# Altium PCB ResetRelays.PcbDoc
Units mm, origin at the board's own origin, x right, y up, seen from the top; angles counter-clockwise.
Board outline 46 x 79 mm, 2 copper layers (Top Layer, Bottom Layer); 10 components, 10 nets, 52 pads, 0 vias.
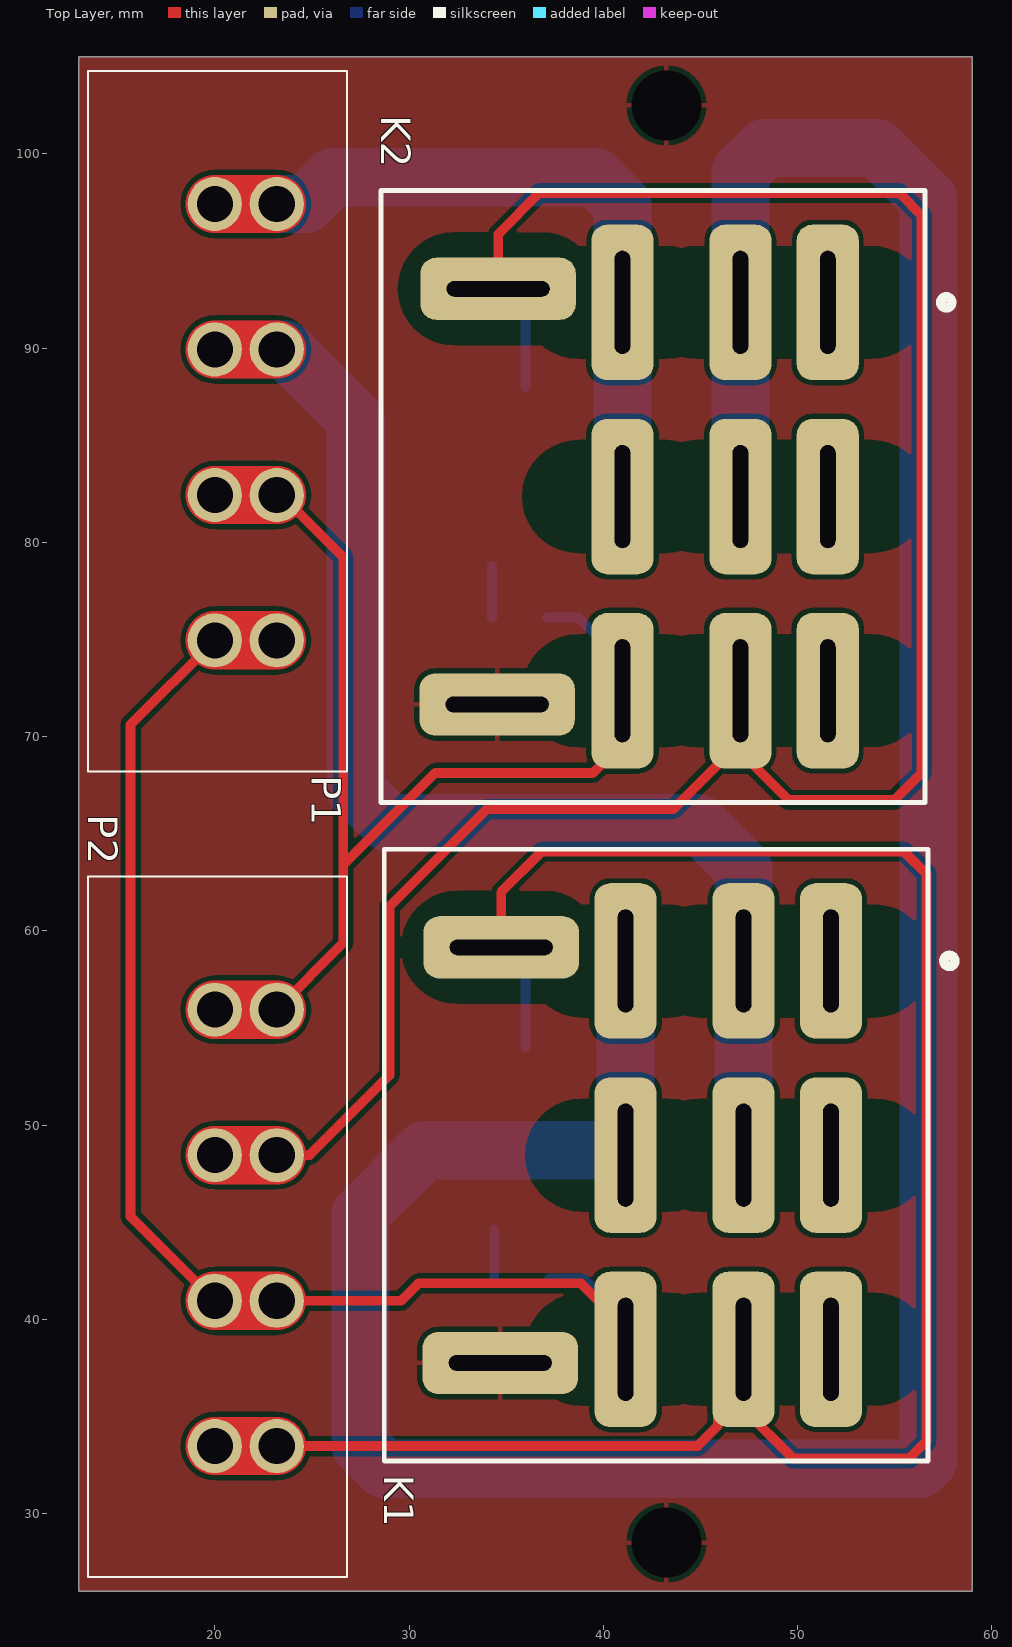
[diagram p0: Top Layer view]
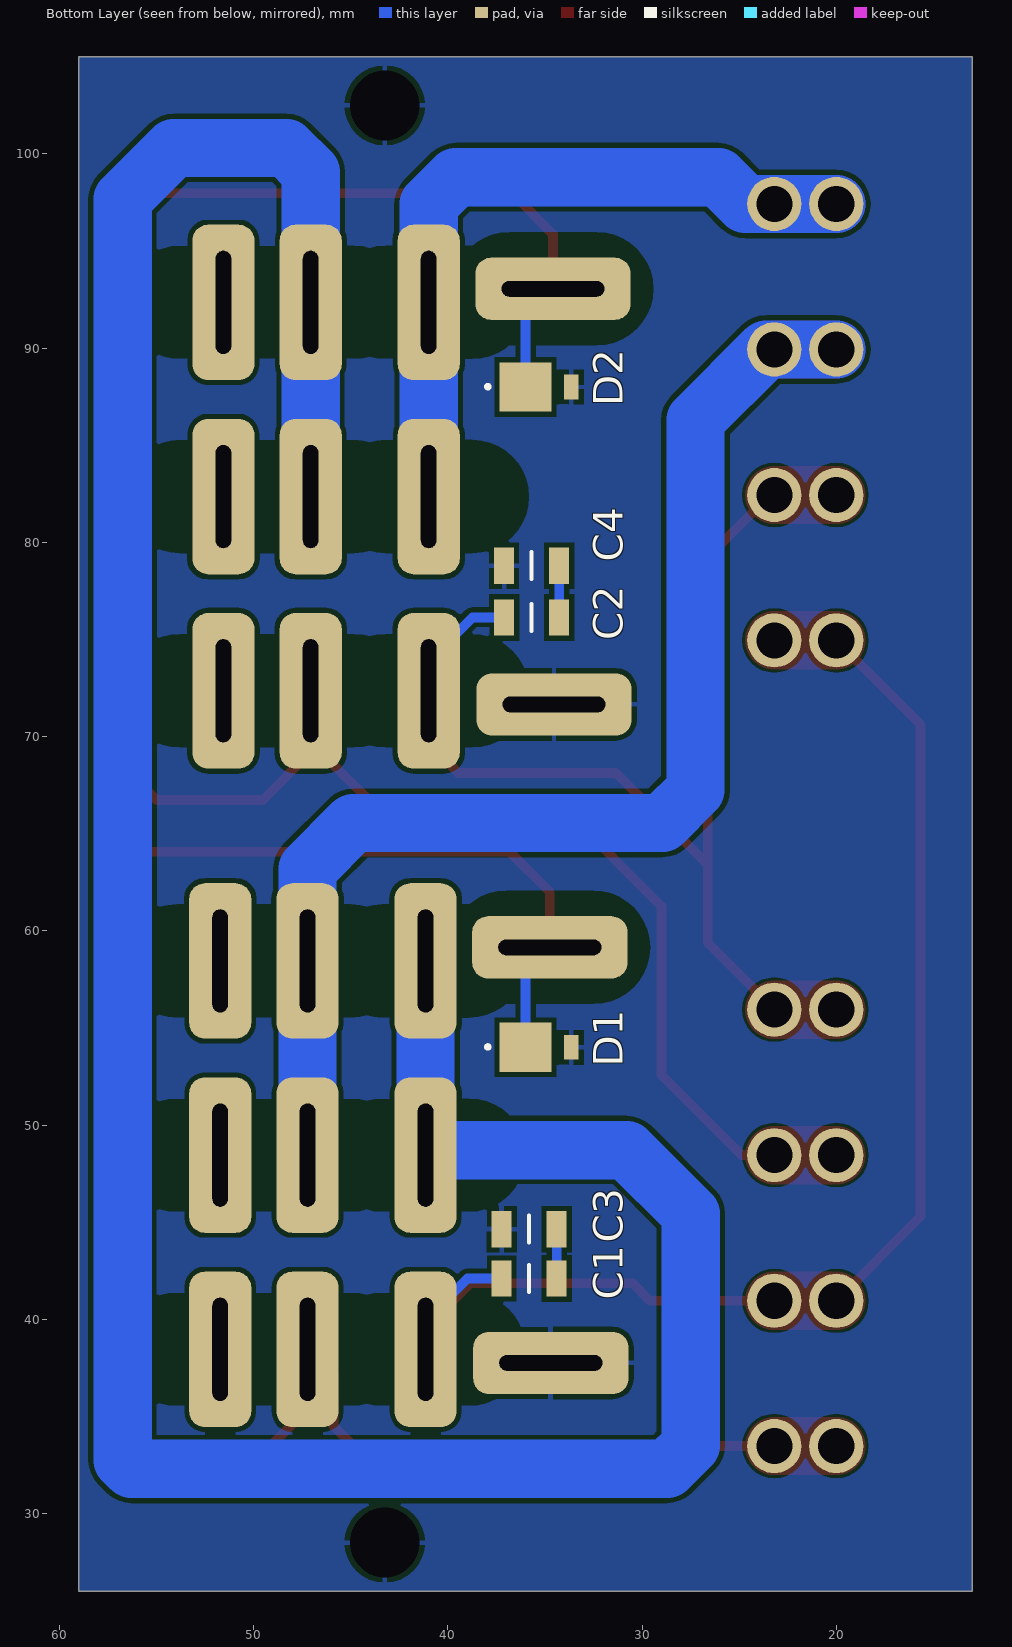
[diagram p1: Bottom Layer view, seen from below]
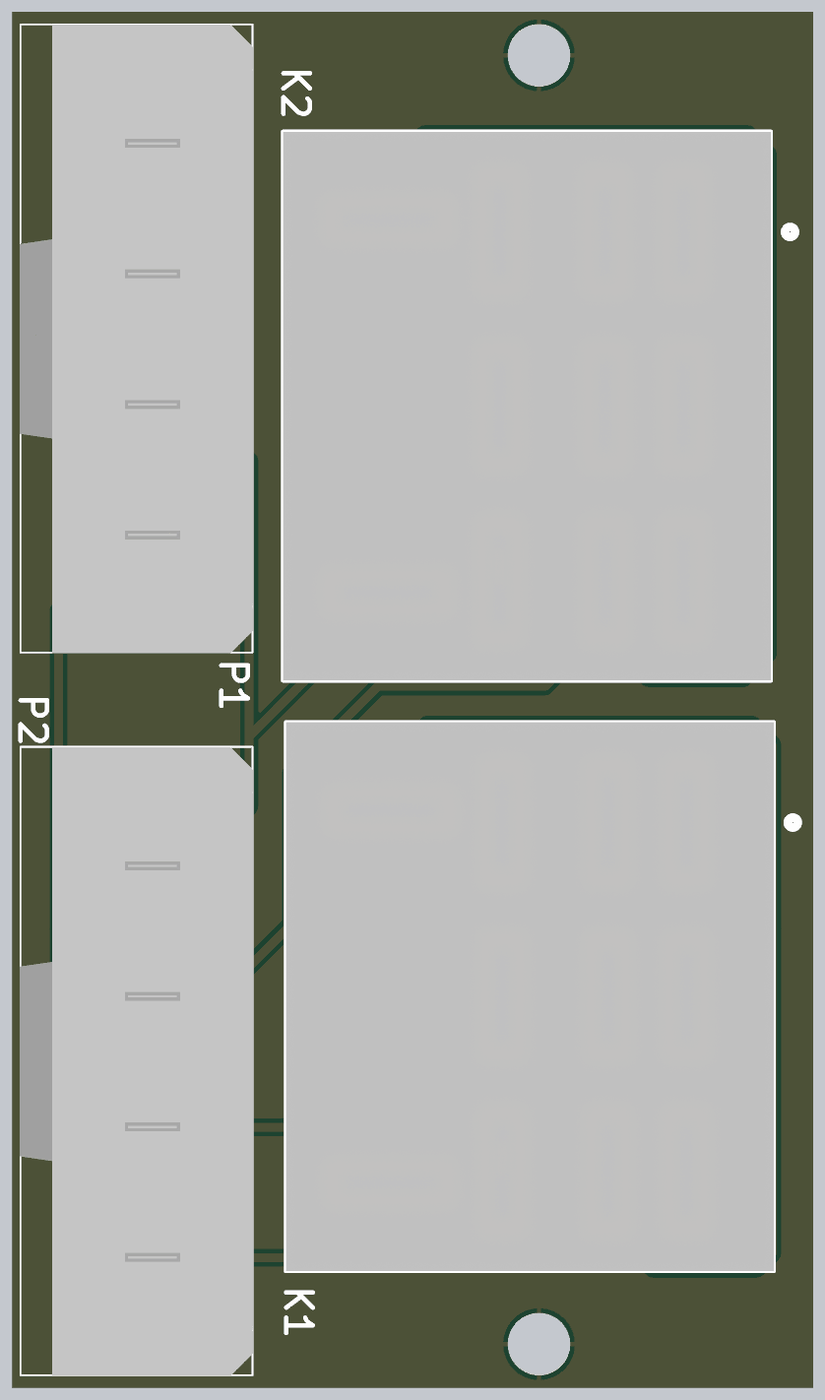
[diagram p2: 3D render of the assembled board from above, using the file's embedded part models]
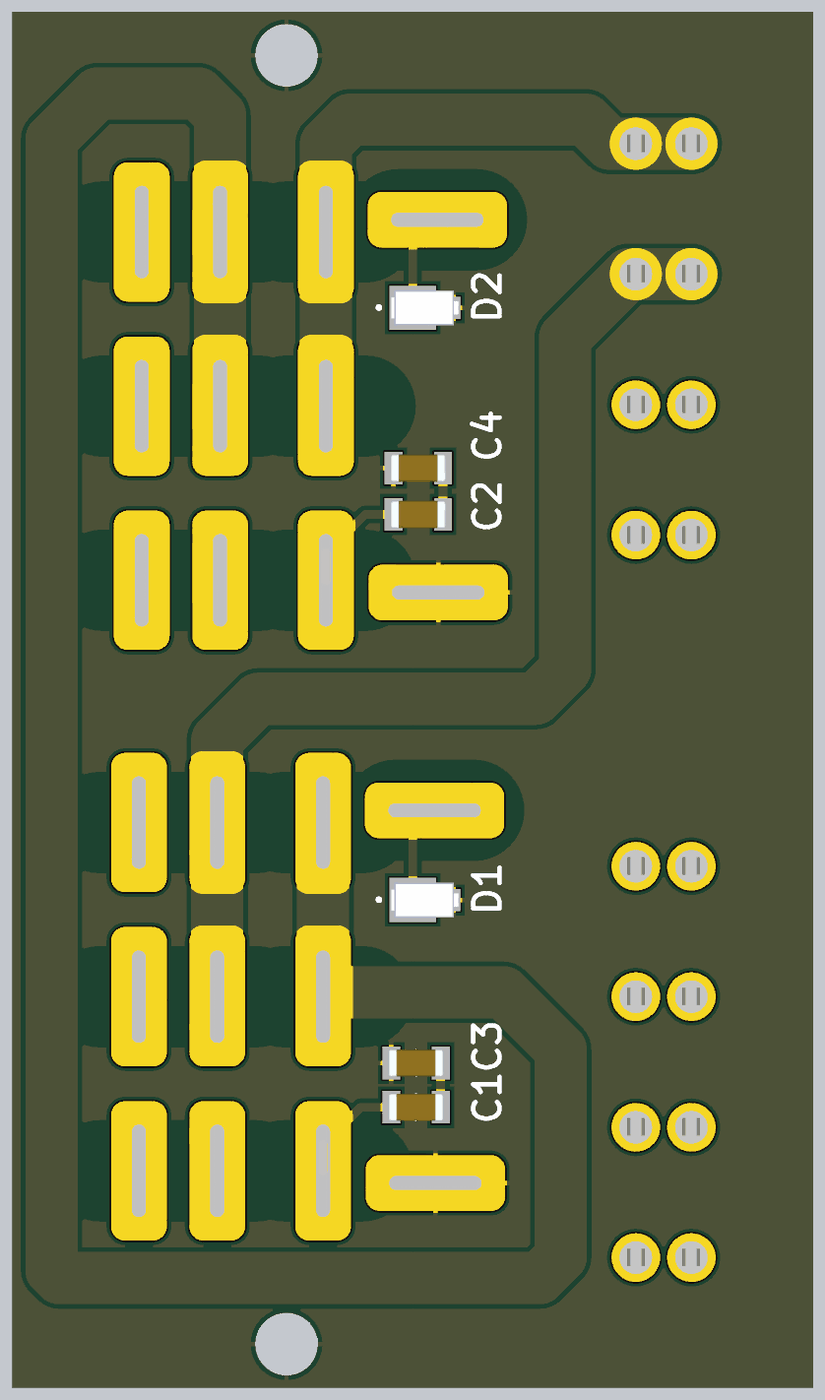
[diagram p3: 3D render of the assembled board from below, using the file's embedded part models]

## Layer stack, top to bottom
Top Solder: solder mask 0.0102, Solder Resist, Dk 3.5
Top Layer: signal copper 0.0356
Dielectric 1: dielectric 0.32, FR-4, Dk 4.8
Bottom Layer: signal copper 0.0356
Bottom Solder: solder mask 0.0102, Solder Resist, Dk 3.5

## Board outline
13,105 59,105 59,26 54,26 13,26

## Design rules (kind name [scope] priority, off if disabled: settings)
Clearance [All] p1: gap=0.255 ignorepadtopadclearanceinfootprint=FALSE
Height [All] p1: minheight=0 maxheight=228.6 prefheight=12.7
PolygonConnect [All] p1: connectstyle=Relief reliefconductorwidth=0.254 reliefentries=4 polygonreliefangle="90 Angle" airgapwidth=0.254
RoutingVias [All] p1: holewidth=0.711 width=1.27 viastyle="Through Hole" minholewidth=0.711 minwidth=1.27 maxholewidth=0.711 maxwidth=1.27
ShortCircuit ShortCircuit_1 [InNet('No Net') vs InNet('No Net')] p2: allowed=TRUE
SolderMaskExpansion [All] p1: expansion=0.102
Width [All] p1: maxlimit=3 minlimit=0.254 preferedwidth=0.5
29 further rules are at their usual default settings.

## Components (designator, comment, footprint, x,y, rotation, side; value= is the part's Value field where it differs from the comment)
C1 "4.7uF" CAPC3216X170N 35.814,42.1 r0 bottom
C2 "4.7uF" CAPC3216X170N 35.687,76.136 r0 bottom
C3 "4.7uF" CAPC3216X170N 35.814,44.64 r180 bottom
C4 "4.7uF" CAPC3216X170N 35.687,78.803 r180 bottom
D1 "Diode" DO-220AA 35.301,54 r180 bottom
D2 "Diode" DO-220AA 35.301,88 r180 bottom
K1 "Relay-3PDT" 55.13 54.223,69.2 r270 top
K2 "Relay-3PDT" 55.13 54.062,103.109 r270 top
P1 "43160-3102" 431603102 21.091,86.247 r270 top
P2 "43160-3102" 431603102 21.091,44.76 r270 top

## Footprints (in the part's own frame and the unit in brackets; to place one, negate y for a bottom-side part, rotate by r counter-clockwise, add the part's x,y. Pads: shape width x height; smd on the part's side, far side on the other; paste and mask are expansions set on the pad)
55.13 [mm]
  rrect50% 8x3.2 hole 5.3 slot 0.8 at 90 deg: 1(10.75,-2.5) 2(20.75,-2.5) 3(30.75,-2.5) 4(10.75,-7) 5(20.75,-7) 6(30.75,-7) 7(10.75,-13.075) 8(20.75,-13.075) 9(30.75,-13.075)
  rrect50% 3.2x8 hole 5.3 slot 0.8 at 0 deg: 10(10.05,-19.475) 11(31.45,-19.525)
  silkscreen extent 5,-25.5 36.5,3.88, body extent 5,-25.5 36.5,2.5, height 36.5
431603102 [mm]
  round 2.79 hole 1.86: 1(11.292,-1.091) 1(11.292,2.1) 2(3.81,2.1) 2(3.81,-1.091) 3(-3.69,2.1) 3(-3.69,-1.091) 4(-11.18,-1.091) 4(-11.18,2.1)
  silkscreen extent -18.03,-7.62 18.03,5.72, body extent -18,-7.66 18.06,5.73, height 15.38
CAPC3216X170N [mm]
  rect 1.03x1.87 smd: 1(-1.42,0) 2(1.42,0)
  silkscreen extent 0,-0.7 0,0.7, body extent -1.6,-0.8 1.6,0.8, height 1.7
DO-220AA [mil]
  rect 30x50 smd: 1(65.06,0)
  rect 105.12x100 smd: 2(-27.5,0)
  silkscreen extent -107,-2 -102,3, body extent -76,-40 76,40, height 39

## Part data
C1 C2 C3 C4: library part "Cap Semi", "Capacitor (Semiconductor SIM Model)", Capacitance=1uF, Case/Package=1206, Case Code (Metric)=3216, Dielectric=X7R, Manufacturer=Murata, Manufacturer Part Number=GRM31MR71H105KA88L, Max Operating Temperature=125°C, Min Operating Temperature=-55°C, Package Quantity=1, Supplier Part Number=1276-1055-1-ND, Tolerance=10%, Voltage=50V, Case Code (Imperial)=1206, ComponentLink1Description=https://datasheet.ciiva.com/16379/product-16379616.pdf, ComponentLink1URL=https://datasheet.ciiva.com/16379/product-16379616.pdf, ComponentLink2Description=https://datasheet.ciiva.com/14116/nmgrm-data-en-14116709.pdf, ComponentLink2URL=https://datasheet.ciiva.com/14116/nmgrm-data-en-14116709.pdf, ComponentLink3Description=https://datasheet.ciiva.com/22703/608985-22703384.pdf, ComponentLink3URL=https://datasheet.ciiva.com/22703/608985-22703384.pdf, ComponentLink4Description=https://datasheet.ciiva.com/3777/42grm31mr71h105ka8823-3777081.pdf, ComponentLink4URL=https://datasheet.ciiva.com/3777/42grm31mr71h105ka8823-3777081.pdf, ComponentLink5Description=https://datasheet.ciiva.com/6270/partnumbering-e-01-6270398.pdf, ComponentLink5URL=https://datasheet.ciiva.com/6270/partnumbering-e-01-6270398.pdf, ComponentLink6Description=https://datasheet.ciiva.com/6270/partnumbering-e-01-6270399.pdf, ComponentLink6URL=https://datasheet.ciiva.com/6270/partnumbering-e-01-6270399.pdf, ComponentLink7Description=https://datasheet.ciiva.com/29199/455056-da-01-en-vs-kondensator-1206-29199449.pdf, ComponentLink7URL=https://datasheet.ciiva.com/29199/455056-da-01-en-vs-kondensator-1206-29199449.pdf, ComponentLink8Description=https://datasheet.ciiva.com/29202/450923-da-01-de-vs-chip-kond-1206-1-0-uf-10pr-50-0v-x7r-29202718.pdf, ComponentLink8URL=https://datasheet.ciiva.com/29202/450923-da-01-de-vs-chip-kond-1206-1-0-uf-10pr-50-0v-x7r-29202718.pdf, Depth=1.6mm, Height=1.15mm, LatestRevisionDate=29-May-2009, LatestRevisionNote="IPC-7351 Footprint Added.", Lead Free="Lead Free", Length=3.2mm, Material=Ceramic, Mount="Surface Mount", Number of Pins=2, PackageDescription="Chip Capacitor", PackageReference=C1206, Packaging="Tape and Reel", Published=8-Jun-2000, Publisher="Altium Limited", REACH SVHC="No SVHC", Stock 1=0, Supplier 1=Digi-Key, Supplier 2=Digi-Key, Termination=SMD/SMT, Thickness=0.049inch, Voltage Rating=50V, Voltage Rating (DC)=50V, Width=0.063inch
D1 D2: "Default Diode", Supplier Part Number=SS1P3L-M3/84AGICT-ND, Code_JEDEC=DO-214-AB, LatestRevisionDate=17-Jul-2002, LatestRevisionNote="Re-released for DXP Platform.", PackageDescription="DO-214-AB/SMC; 2 C-Bend Leads; Body 7.9 x 5.9 mm, inc. leads (LxW)", PackageReference=SMC, PackageVersion=Sep-1996, Published=8-Jun-2000, Publisher="Altium Limited", Supplier 1=Digi-Key, Supplier 2=Digi-Key
P1 P2: library part 0431600104, "4pin blade header molex", Manufacturer_Name=Molex, RS Part Number=3639982P, Allied_Number=70372885, Allied Price/Stock=https://www.alliedelec.com/molex-incorporated-43160-3102/70372885/, Arrow Part Number=43160-3102, Arrow Price/Stock=http://uk.rs-online.com/web/p/products/3639982P, Datasheet Link=https://www.molex.com/pdm_docs/sd/431603102_sd.pdf, Geometry.Height=11mm, Manufacturer_Part_Number=43160-3102, RS Price/Stock=http://uk.rs-online.com/web/p/products/3639982P
K1 K2: ComponentLink1Description="Manufacturer Link", ComponentLink2Description=Datasheet

## Free pads (board coordinates)
  round 0 hole 3.6 unplated: 2(43.25,28.5) 2(43.25,102.5)

## Nets (pads, with @x,y where several pads share a name; then routed paths per layer and width w, separated by ;. In a path a pad name is that pad's centre, name@x,y a point inside that pad or via, vN(x,y) a via of type N, cw(c..) or ccw(c..) an arc to the next point about the centre after c; other vN are vias at no path point)
GND: C3.1 C4.1 D1.1 D2.1 K1.11 K2.11 pad.2
NetC1_1: C1.1 C3.2 | length 2.5
  Bottom Layer w0.5: C1.1 C3.2
NetC1_2: C1.2 K1.9 P1.1 P2.2 | length 70.7
  Top Layer w0.5: P2.2@20,40.95 15.661,45.289 15.661,70.617 P1.1@20,74.955 ; P2.2@23.191,40.95 29.584,40.95 30.48,41.846 38.862,41.846 41.148,39.56 K1.9
  Top Layer w3: P2.2@20,40.95 P2.2@23.191,40.95 ; P1.1@20,74.955 P1.1@23.191,74.955
  Bottom Layer w0.5: C1.2 38.989,42.1 41.148,39.941 K1.9
NetC2_1: C2.1 C4.2 | length 2.7
  Bottom Layer w0.5: C2.1 C4.2
NetC2_2: C2.2 K2.9 P1.2 P2.4 | length 63.4
  Top Layer w0.5: P2.4@23.191,55.94 26.612,59.361 26.612,63.397 ; P1.2@23.191,82.437 23.419,82.437 26.612,79.245 26.612,63.397 ; K2.9@40.987,73.923 K2.9 40.987,69.654 39.464,68.131 31.345,68.131 26.612,63.397
  Top Layer w3: P2.4@20,55.94 P2.4@23.191,55.94 ; P1.2@20,82.437 P1.2@23.191,82.437
  Bottom Layer w0.5: C2.2 38.735,76.136 40.987,73.884 K2.9
NetD1_2: D1.2 K1.6 K1.10 P2.1 | length 105.7
  Top Layer w0.5: P2.1@23.191,33.468 44.866,33.468 45.891,34.493 45.891,37.118 K1.6 47.223,35.39 49.784,32.829 55.753,32.829 56.642,33.718 56.642,62.928 55.499,64.071 36.83,64.071 34.748,61.989 K1.10
  Top Layer w3: P2.1@20,33.468 P2.1@23.191,33.468
  Bottom Layer w0.5: K1.10 36,57.898 D1.2
NetD2_2: D2.2 K2.6 K2.10 P2.3 | length 115.1
  Top Layer w0.5: P2.3@23.191,48.45 24.878,48.45 29,52.572 29,61.259 34.003,66.262 43.607,66.262 46.551,69.206 K2.6@47.062,69.206 ; K2.10 34.587,95.864 36.703,97.98 55.245,97.98 56.388,96.837 56.388,68.135 54.991,66.738 49.53,66.738 K2.6@47.062,69.206 ; K2.6 K2.6@47.062,69.206
  Top Layer w3: P2.3@20,48.45 P2.3@23.191,48.45
  Bottom Layer w0.5: K2.10 36,91.646 D2.2
NetK1_4: K1.4 K1.5 P1.3 | length 67.4
  Top Layer w3: P1.3@20,89.937 P1.3@23.191,89.937
  Bottom Layer w3: P1.3@20,89.937 23.191,89.937 23.612,89.937 27.25,86.3 27.25,67.25 28.943,65.557 44.866,65.557 47.223,63.2 K1.4 K1.5
NetK1_7: K1.7 K1.8 K2.4 K2.5 | length 159.8
  Bottom Layer w3: K1.8 K1.8@41.148,48.704 ; K1.7 K1.8@41.148,48.704 ; K2.5 K2.4 47.062,99.062 48.309,100.309 54.117,100.309 56.744,97.683 56.744,32.744 56.296,32.296 28.704,32.296 27.5,33.5 27.5,45.418 30.786,48.704 K1.8@41.148,48.704
NetK2_7: K2.7 K2.8 P1.4 | length 40.4
  Top Layer w3: P1.4@20,97.427 P1.4@23.191,97.427
  Bottom Layer w3: P1.4@20,97.427 23.191,97.427 24.691,97.427 26.069,98.806 39.6,98.806 40.987,97.419 K2.7 K2.8
pads on no net: K1.1 K1.2 K1.3 K2.1 K2.2 K2.3

## Polygon pours and split planes (outlines as drawn)
GND on Top Layer "gnd" (solid, pour order 1): 13,26 13,105 59,105 59,26
GND on Bottom Layer "Top Layer-No Net" (solid, pour order 3): 13,26 13,105 59,105 59,26